# Altium PCB PCB1.PcbDoc
Units mm, origin at the board's own origin, x right, y up, seen from the top; angles counter-clockwise.
Board outline 74.3 x 38.23 mm, 2 copper layers (Top Layer, Bottom Layer); 19 components, 15 nets, 74 pads, 0 vias.
Unrouted connection lines stored in the file: 1.
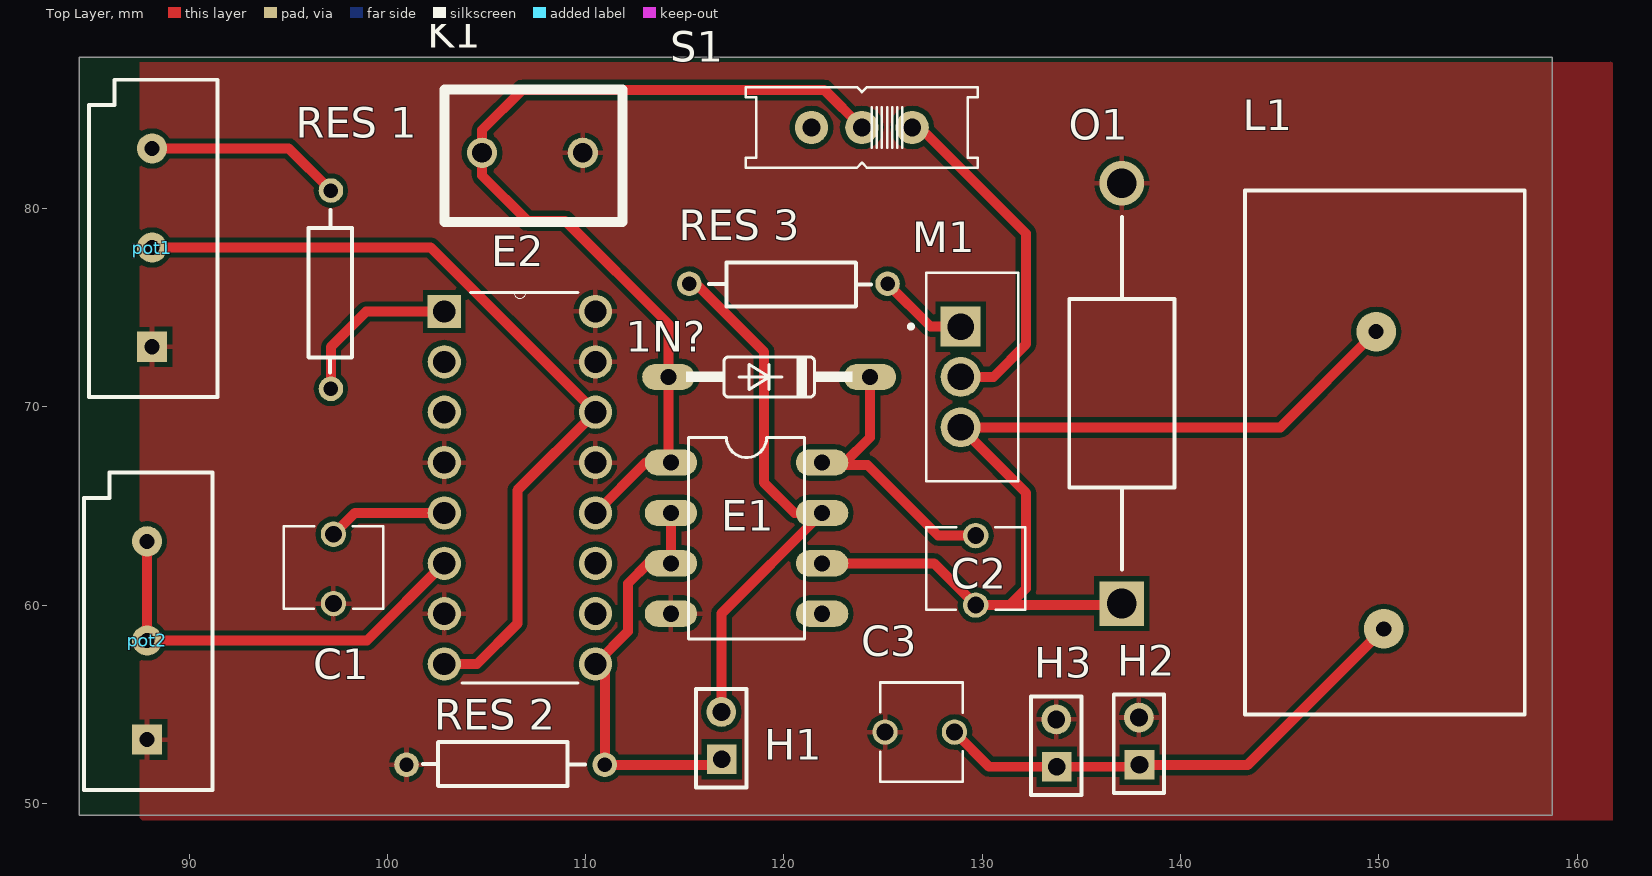
[diagram p0: Top Layer view]
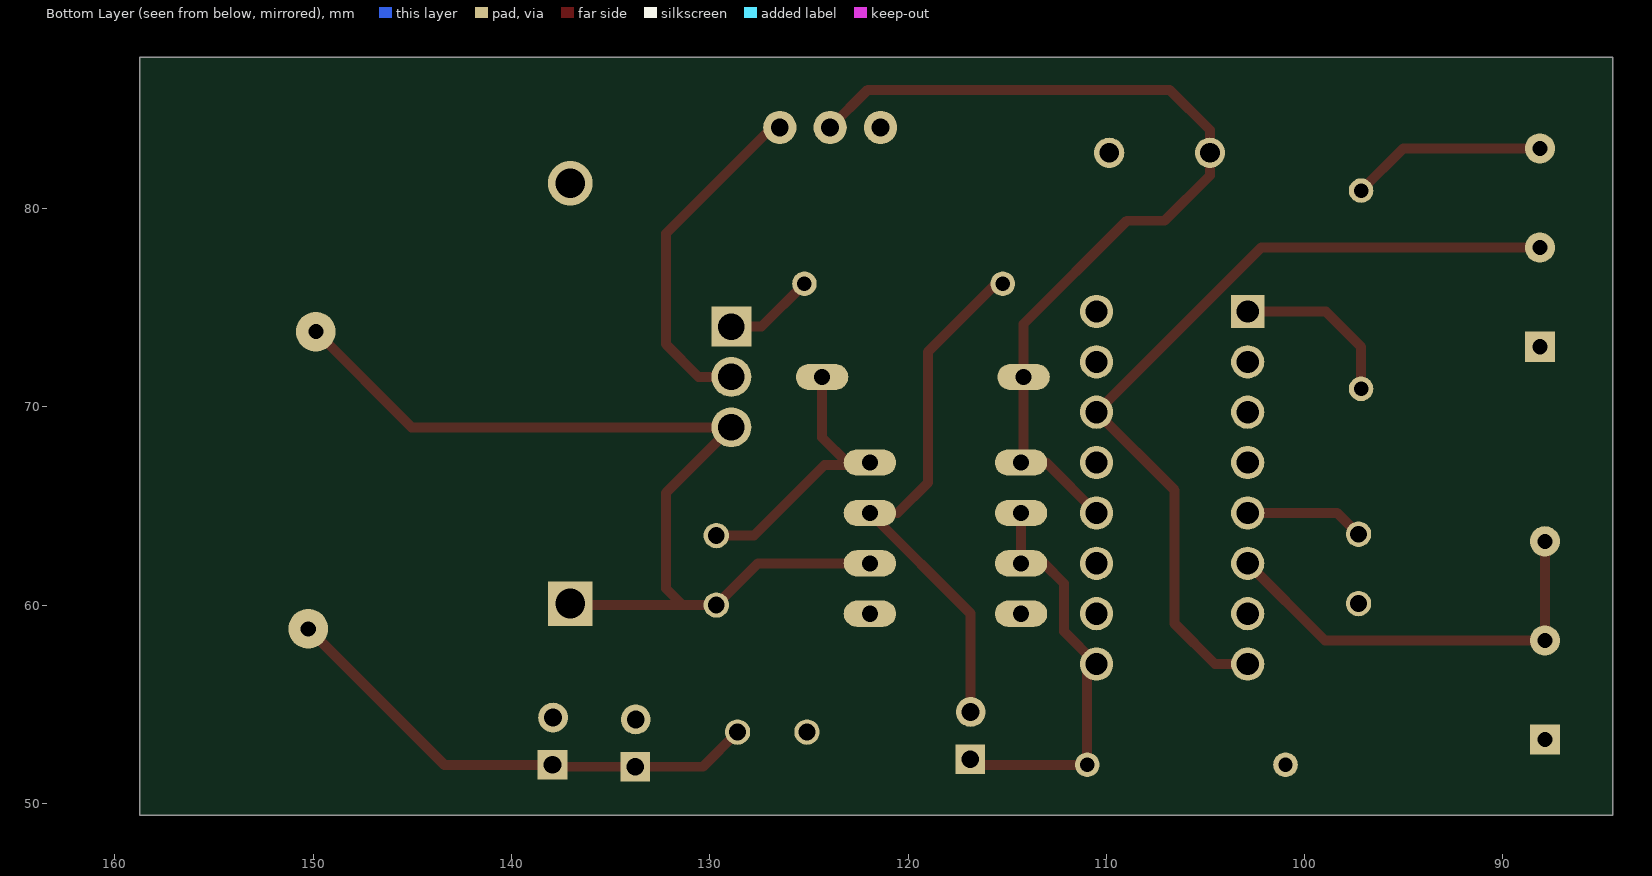
[diagram p1: Bottom Layer view, seen from below]
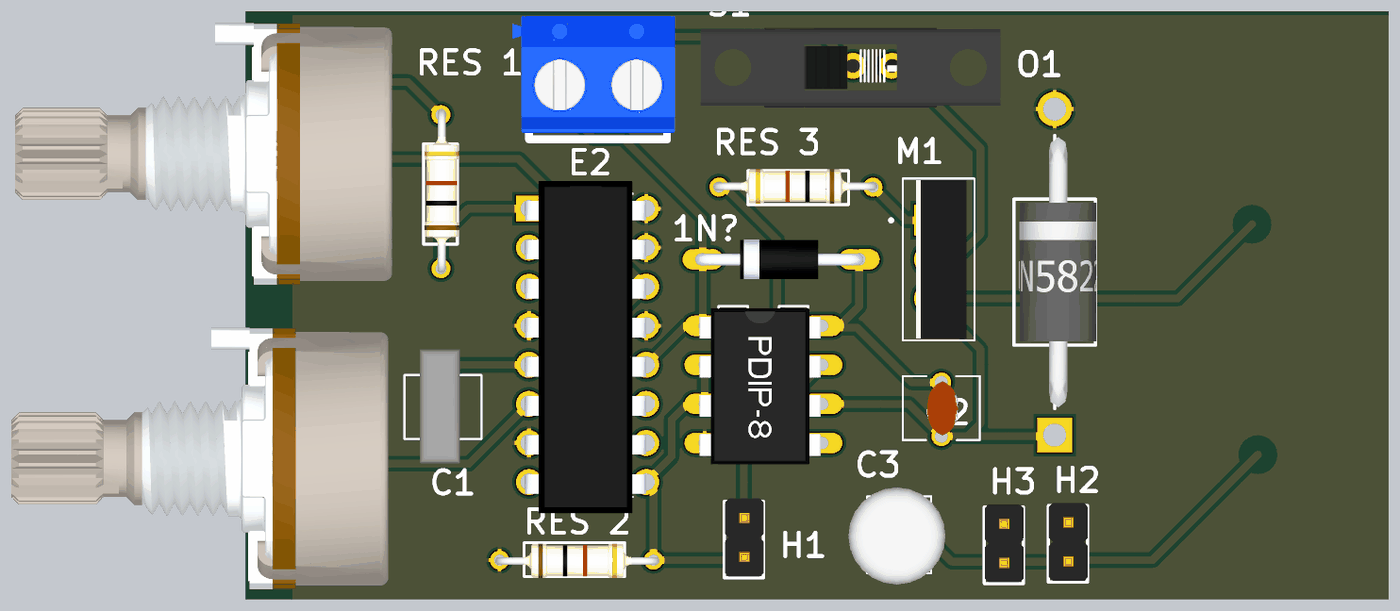
[diagram p2: 3D render of the assembled board from above, using the file's embedded part models]

## Layer stack, top to bottom
Top Solder: solder mask 0.0102, Solder Resist, Dk 3.5
Top Layer: signal copper 0.0356
Dielectric 1: dielectric 0.32, FR-4, Dk 4.8
Bottom Layer: signal copper 0.0356
Bottom Solder: solder mask 0.0102, Solder Resist, Dk 3.5

## Board outline
84.455,49.403 158.75,49.403 158.75,87.63 84.455,87.63

## Design rules (kind name [scope] priority, off if disabled: settings)
Clearance [All] p1: gap=0.254 ignorepadtopadclearanceinfootprint=FALSE except(0: Arc-Hole Track-Hole SMDPad-Hole THPad-Hole Via-Hole Fill-Hole Poly-Hole Region-Hole Text-Hole)
PolygonConnect [All] p1: connectstyle=Relief reliefconductorwidth=0.254 reliefentries=4 polygonreliefangle="90 Angle" airgapwidth=0.254
RoutingVias [All] p1: holewidth=0.711 width=1.27 viastyle="Through Hole" minholewidth=0.711 minwidth=1.27 maxholewidth=1 maxwidth=2
SolderMaskExpansion [All] p1: expansion=0.102
Width [All] p1: maxlimit=0.5 minlimit=0.254 preferedwidth=0.254 minimp=50.000000 maximp=50.000000 favimp=50.000000
30 further rules are at their usual default settings.

## Components (designator, comment, footprint, x,y, rotation, side; value= is the part's Value field where it differs from the comment)
1N? "1N4158" 1N4158 125.603,72.263 r180 top
C1 "0.01" "0,01 uf" 100.088,58.88 r90 top
C2 "0,22" "22uf CAP" 131.945,59.561 r90 top
C3 "4,7 uf" "4,7 uf" 123.748,52.049 r0 top
E1 "IR_2101" IR_2101 115.062,68.58 r270 top
E2 "TL494" TL_494 103.251,56.007 r0 top
H1 "" "HEADEDR 2" 112.04,50.65 r0 top
H2 "" "HEADEDR 2" 133.097,50.368 r0 top
H3 "tas direnc" "HEADEDR 2" 128.931,50.269 r0 top
K1 "klemens(2pin)" klemens 101.628,79.831 r0 top
L1 "1mH,1A" INDUCTOR 142.982,93.798 r270 top
M1 "IRF_540" IRF_540 127.127,76.962 r270 top
O1 "1N5822" 1N5822 138.303,58.733 r90 top
pot1 "RPot" POT 92.301,67.898 r90 top value=10K
pot2 "RPot" POT 92.047,48.086 r90 top value=50K
"RES 1" "1 K" res 93.091,81.661 r270 top
"RES 2" "1 K" res 111.727,56.007 r180 top
"RES 3" "120" res 114.46,72.136 r0 top
S1 "SWİTCH" SWİTCH 133.858,85.979 r180 top

## Footprints (in the part's own frame and the unit in brackets; to place one, negate y for a bottom-side part, rotate by r counter-clockwise, add the part's x,y. Pads: shape width x height; smd on the part's side, far side on the other; paste and mask are expansions set on the pad)
"0,01 uf" [mm]
  round 1.28 hole 0.85: 1(1.191,2.806) 1(1.191,2.806) 1(1.191,2.806) 1(1.191,2.806) 2(4.691,2.806)
  silkscreen extent 0.94,0.31 5.1,5.31, body extent -0.64,1.7 6.76,4.31, height 6.6
1N4158 [mil]
  oval 104x52 hole 32: A(450,30) C(50,30)
  silkscreen extent 85,-10 415,70, body extent 40,-20 470,80, height 100
1N5822 [mm]
  round 2.25 hole 1.5: A(22.538,1.27)
  rect 2.25x2.25 hole 1.5: C(1.338,1.27)
  silkscreen extent 3.05,-1.38 20.83,3.92, body extent 2.45,-1.46 21.43,3.56, height 2.64
"4,7 uf" [mm]
  round 1.28 hole 0.85: 1(1.347,1.545) 1(1.347,1.545) 1(1.347,1.545) 1(1.347,1.545) 2(4.847,1.545)
  silkscreen extent 1.1,-0.96 5.26,4.04, body extent -0.12,-1.68 6.18,4.62, height 11
"22uf CAP" [mm]
  round 1.28 hole 0.85: 1(0.439,2.278) 1(0.439,2.278) 1(0.439,2.278) 1(0.439,2.278) 2(3.939,2.278)
  silkscreen extent 0.19,-0.22 4.35,4.78, body extent 0.5,1.16 4,3.2, height 3.75
"HEADEDR 2" [mm]
  rect 1.5x1.5 hole 0.9: 1(4.825,1.575)
  round 1.5 hole 0.9: 2(4.8,3.96)
  silkscreen extent 3.53,0.15 6.07,5.13, body extent 3.55,0.23 6.09,5.31, height 8.89
INDUCTOR [mm]
  round 2 hole 0.762: 1(20.011,6.878) 2(34.997,7.259)
  silkscreen extent 12.9,0.27 39.31,14.37, body extent -0.06,-1.87 61.93,15.38, height 42.84
IR_2101 [mil]
  oval 52x104 hole 32: 1(55,-30) 2(155,-30) 3(255,-30) 4(355,-30) 5(355,270) 6(255,270) 7(155,270) 8(55,270)
  silkscreen extent 5,5 405,235, body extent 10,-44 410,266, height 170
IRF_540 [mm]
  rect 2.01x2.01 hole 1.34: 1(2.921,1.778)
  round 2.01 hole 1.34: 2(5.461,1.778) 3(8.001,1.778)
  silkscreen extent 0.2,-0.82 10.72,4.69, body extent 0.31,0.89 10.61,4.19, height 15.22
klemens [mil]
  round 60 hole 39.37: 1(123.9,117.05) 2(323.9,117.05)
  silkscreen extent 49,-21 402,243, body extent 6,-4 423,295, height 394
POT [mil]
  rect 60x60 hole 30: 1(201.85,163.9)
  round 60 hole 30: 2(398.7,163.9) 3(595.55,163.9)
  silkscreen extent 102,34 732,289, body extent 77,-66 746,898, height 807
res [mil]
  round 48.74 hole 28.74: 1(30,160) 1(30,160) 2(423.7,160)
  silkscreen extent 69,115 391,202, body extent 15,118 434,206, height 83
SWİTCH [mil]
  round 66 hole 35.43: O(291.06,74.65) P(391.06,74.65) S(491.06,74.65)
  silkscreen extent 161,-5 621,155, body extent 13,-26 781,185, height 171
TL_494 [mil]
  rect 66x66 hole 44: 1(-15,740)
  round 66 hole 44: 2(-15,640) 3(-15,540) 4(-15,440) 5(-15,340) 6(-15,240) 7(-15,140) 8(-15,40) 9(285,40) 10(285,140) 11(285,240) 12(285,340) 13(285,440) 14(285,540) 15(285,640) 16(285,740)
  silkscreen extent 20,2 250,778, body extent -25,-40 285,810, height 165

## Part data
C1: library part "0,01 uf"
C2: library part CAP
H1 H2 H3: library part "HEADER 2"
L1: library part inductor
pot1 pot2: "Potentiometer", LatestRevisionDate=17-Jul-2002, LatestRevisionNote="Re-released for DXP Platform.", PackageDescription="Variable Resistor, Thru-Hole; 3 Leads", PackageReference=VR5, Published=8-Jun-2000, Publisher="Altium Limited", Set Position=0.5, Sim Note="Enter the Resistance value and the set point into parameter fields."
"RES 1" "RES 2" "RES 3": library part res

## Nets (pads, with @x,y where several pads share a name; then routed paths per layer and width w, separated by ;. In a path a pad name is that pad's centre, name@x,y a point inside that pad or via, vN(x,y) a via of type N, cw(c..) or ccw(c..) an arc to the next point about the centre after c; other vN are vias at no path point)
GND: "RES 2.2" C1.1 C3.1 E1.4 E2.4 E2.7 E2.13 E2.15 E2.16 H2.2 H3.2 K1.2 O1.A pot1.1 pot2.1
Net1N?_C: 1N?.C C2.2 E1.8 | length 15.3
  Top Layer w0.5: 1N?.C 124.333,68.453 123.063,67.183 E1.8 122.047,67.056 124.206,67.056 127.762,63.5 C2.2
NetC1_2: C1.2 E2.5 | length 6
  Top Layer w0.5: C1.2 98.354,64.643 E2.5
NetC2_1: C2.1 E1.6 L1.1 M1.3 O1.C | length 49.6
  Top Layer w0.5: E1.6 127.564,62.103 129.667,60 131.374,60 ; O1.C 136.962,60 131.374,60 ; L1.1 145.034,68.961 M1.3 132.207,65.659 132.207,60.833 131.374,60
NetC3_2: C3.2 H2.1 H3.1 L1.2 | length 25.3
  Top Layer w0.5: C3.2 130.345,51.844 H3.1 137.823,51.844 H2.1 143.383,51.943 L1.2
NetE1_2: "RES 2.1" E1.2 E1.3 E2.9 H1.1 | length 21.2
  Top Layer w0.5: E1.2 E1.3 113.157,62.103 112.141,61.087 112.141,58.674 E2.9 110.965,56.548 110.965,51.943 116.583,51.943 H1.1
NetE1_7: "RES 3.1" E1.7 H1.2 | length 27.5
  Top Layer w0.5: 115.222,76.2 115.57,76.2 118.999,72.771 118.999,66.167 120.523,64.643 E1.7 116.84,59.563 H1.2
NetE2_1: "RES 1.2" E2.1 | length 8.6
  Top Layer w0.5: 97.155,70.899 97.155,73.025 98.933,74.803 E2.1
NetE2_2: E2.2 E2.3
NetE2_6: E2.6 pot2.2 pot2.3 | length 21.6
  Top Layer w0.5: pot2.3 pot2.2 98.98,58.213 E2.6
NetE2_8: E2.8 E2.14 pot1.2 | length 42.6
  Top Layer w0.5: pot1.2 102.188,78.025 E2.14 106.553,65.786 106.553,59.055 104.521,57.023 E2.8
NetM1_1: "RES 3.2" M1.1 | length 4.6
  Top Layer w0.5: 125.222,76.2 127.381,74.041 M1.1
NetM1_2: M1.2 S1.O | length 17.5
  Top Layer w0.5: S1.O 126.864,84.083 132.207,78.74 132.207,73.152 130.556,71.501 M1.2
Netpot1_3: "RES 1.1" pot1.3 | length 9.9
  Top Layer w0.5: pot1.3 95.029,83.025 97.155,80.899
VCC: 1N?.A E1.1 E2.12 K1.1 S1.P | length 47.5
  Top Layer w0.5: E2.12 113.03,67.183 E1.1 114.173,67.31 1N?.A 114.173,74.168 108.966,79.375 107.061,79.375 104.775,81.661 K1.1 104.775,83.947 106.807,85.979 122.029,85.979 S1.P
pads on no net: E1.5 E2.10 E2.11 S1.S

## Polygon pours and split planes (outlines as drawn)
GND on Top Layer "GND_L01_P002" (solid, pour order 2): 87.503,87.376 161.671,87.376 161.798,87.503 161.798,49.149 87.63,49.149 87.503,49.276
no net on Top Layer "NONET_L01_P000" (hatched Horizontal grid 0.508 track 0.203, pour order 0): 84.455,87.63